# Altium PCB PCB1.PcbDoc
Units mm, origin at the board's own origin, x right, y up, seen from the top; angles counter-clockwise.
Board outline 152.4 x 101.6 mm, 2 copper layers (Top Layer, Bottom Layer); 11 components, 7 nets, 27 pads, 0 vias.
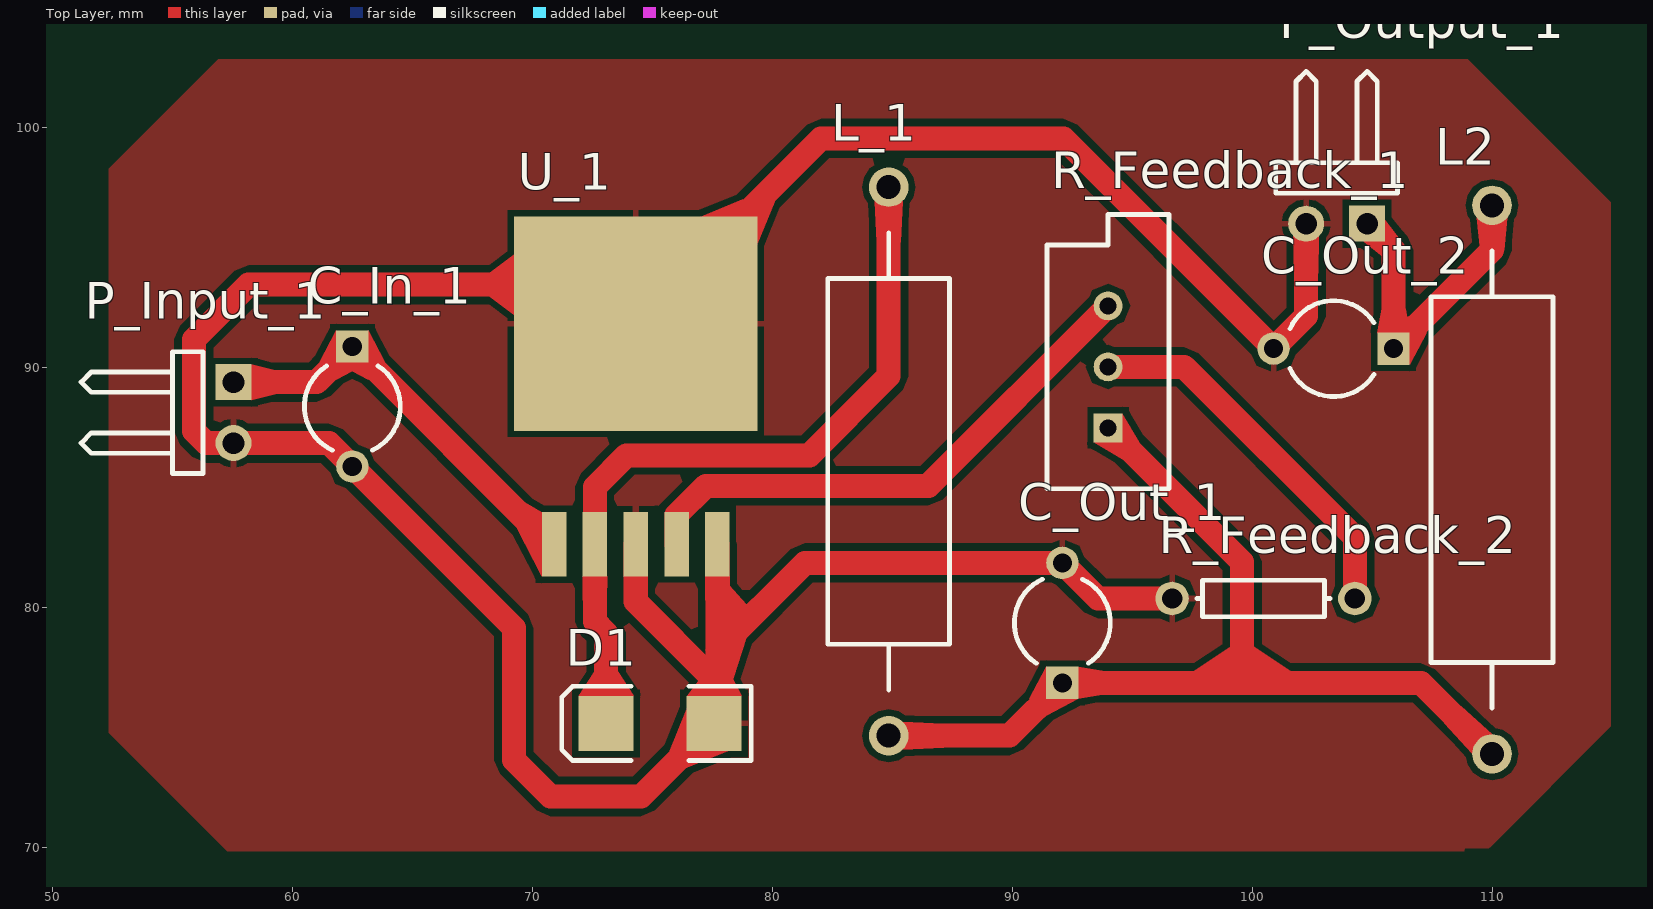
[diagram p0: Top Layer view]
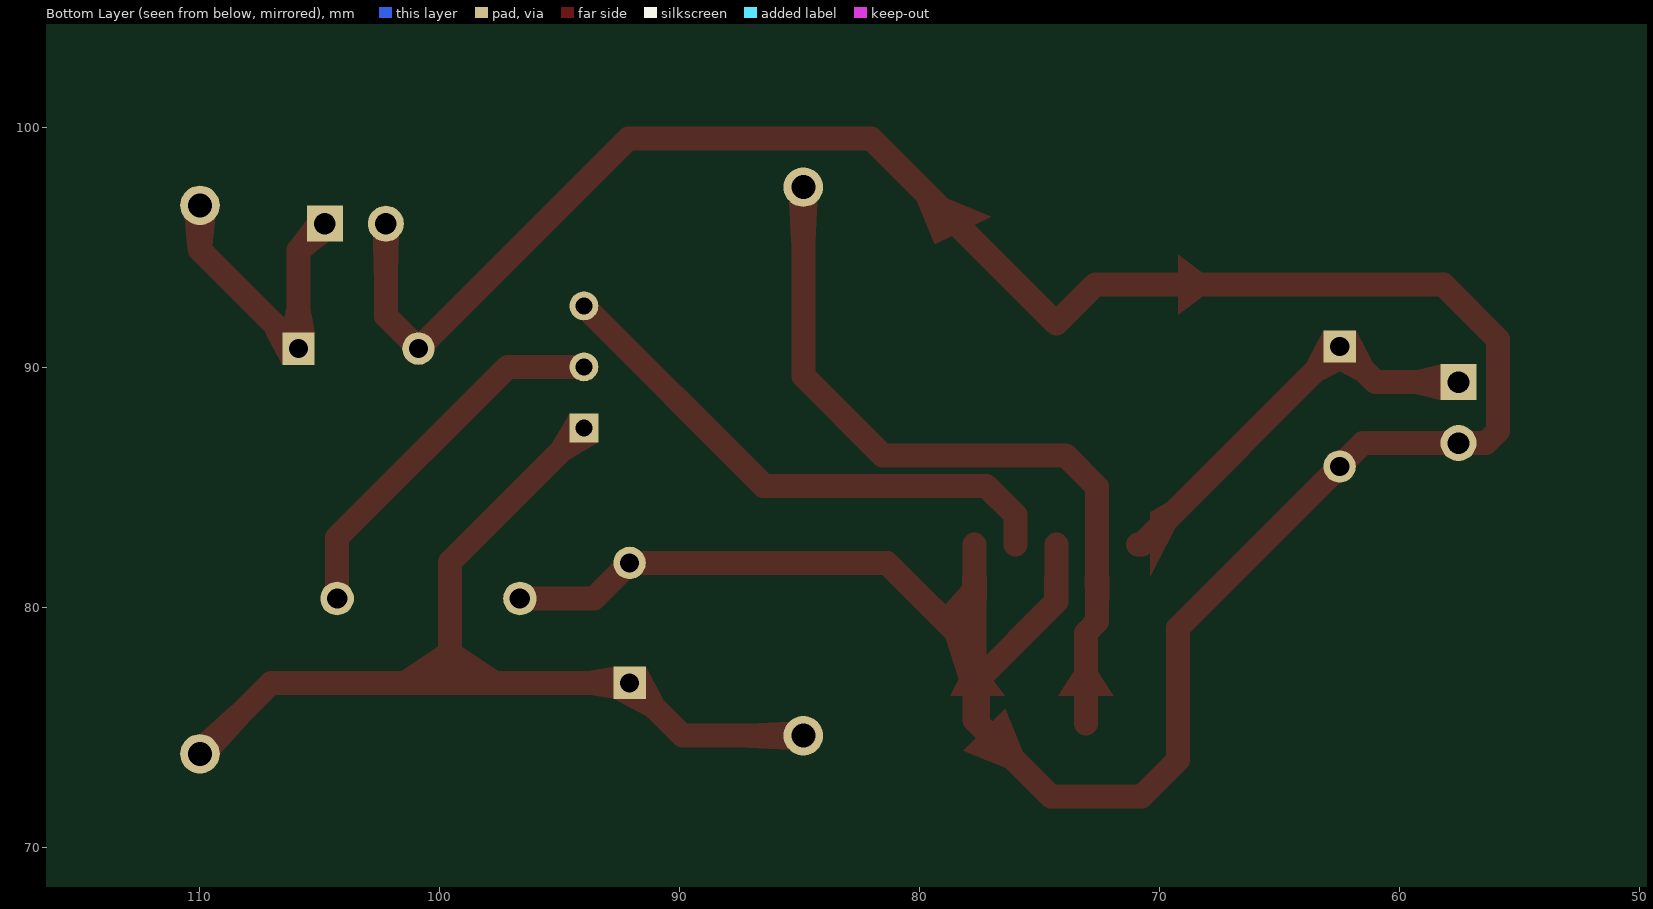
[diagram p1: Bottom Layer view, seen from below]

## Layer stack, top to bottom
Top Solder: solder mask 0.0102, Solder Resist, Dk 3.5
Top Layer: signal copper 0.0356
Dielectric 1: dielectric 0.32, FR-4, Dk 4.8
Bottom Layer: signal copper 0.0356
Bottom Solder: solder mask 0.0102, Solder Resist, Dk 3.5

## Board outline
25.4,25.4 177.8,25.4 177.8,127 25.4,127

## Design rules (kind name [scope] priority, off if disabled: settings)
Clearance [All] p1: gap=0.254 ignorepadtopadclearanceinfootprint=FALSE except(0: Arc-Hole Track-Hole SMDPad-Hole THPad-Hole Via-Hole Fill-Hole Poly-Hole Region-Hole Text-Hole)
PolygonConnect [All] p1: connectstyle=Relief reliefconductorwidth=0.254 reliefentries=4 polygonreliefangle="90 Angle" airgapwidth=0.254
RoutingVias [All] p1: holewidth=0.711 width=1.27 viastyle="Through Hole" minholewidth=0.711 minwidth=1.27 maxholewidth=0.711 maxwidth=1.27
SolderMaskExpansion [All] p1: expansion=0.102
Width [All] p1: maxlimit=1 minlimit=0.254 preferedwidth=0.5
30 further rules are at their usual default settings.

## Components (designator, comment, footprint, x,y, rotation, side; value= is the part's Value field where it differs from the comment)
C_In_1 "Cap2" CAPR5-4X5 62.484,88.392 r270 top value=100uF
C_Out_1 "Cap2" CAPR5-4X5 92.075,79.375 r90 top value=220uF
C_Out_2 "Cap2" CAPR5-4X5 103.378,90.805 r180 top value=100uF
D1 "D Schottky" SMB 75.311,75.184 r180 top
L2 "Inductor Iron" AXIAL-0.9 109.982,85.344 r90 top value=10mH
L_1 "Inductor Iron" AXIAL-0.9 84.836,86.106 r270 top value=33uH
P_Input_1 "Header 2H" HDR1X2H 57.531,89.408 r270 top
P_Output_1 "Header 2H" HDR1X2H 104.775,96.012 r180 top
R_Feedback_1 "RPot" VR5 93.98,90.043 r90 top value=50K
R_Feedback_2 "Res1" AXIAL-0.3 100.457,80.391 r0 top value=1.2K
U_1 "LM2596SX-ADJ/NOPB" TO170P1435X465-6N 74.295,91.694 r0 top

## Footprints (in the part's own frame and the unit in brackets; to place one, negate y for a bottom-side part, rotate by r counter-clockwise, add the part's x,y. Pads: shape width x height; smd on the part's side, far side on the other; paste and mask are expansions set on the pad)
AXIAL-0.3 [mm] "Axial Device, Thru-Hole; 2 Leads; 0.3 in Pin Spacing"
  round 1.4 hole 0.85: 1(-3.81,0) 2(3.81,0)
  silkscreen extent -2.77,-0.76 2.77,0.76
AXIAL-0.9 [mm] "Axial Device, Thru-Hole; 2 Leads; 0.9 in Pin Spacing"
  round 1.65 hole 1: 1(-11.43,0) 2(11.43,0)
  silkscreen extent -9.53,-2.54 9.53,2.54
CAPR5-4X5 [mm] "Capacitor; 2 Leads"
  rect 1.35x1.35 hole 0.8: 1(-2.5,0)
  round 1.35 hole 0.8: 2(2.5,0)
  silkscreen extent -1.69,-2 1.82,2
HDR1X2H [mm] "Connector; Header; 2 Position; Right Angle"
  rect 1.5x1.5 hole 0.9: 1(0,0)
  round 1.5 hole 0.9: 2(2.54,0)
  silkscreen extent -1.27,-6.35 3.81,-1.27
SMB [mm] "DO-214-AA/SMB; 2 C-Bend Leads; Body 5.3 x 3.6 mm, inc. leads (LxW)"
  rect 2.3x2.3 smd: 1(-2.25,0) 2(2.25,0)
  silkscreen extent -3.8,-1.55 4.1,1.55
TO170P1435X465-6N [mil]
  rect 40x106 smd: 1(-134,-356) 2(-67,-356) 3(0,-356) 4(67,-356) 5(134,-356)
  rect 400x352 smd: 6(0,6)
VR5 [mm] "Thru-Hole; 3 Leads"
  rect 1.2x1.2 hole 0.7: 1(-2.54,0)
  round 1.2 hole 0.7: 2(0,0) 3(2.54,0)
  silkscreen extent -5.08,-2.54 6.35,2.54

## Part data
C_In_1 C_Out_1 C_Out_2: "Capacitor", PackageDescription="Capacitor; 2 Leads", PackageReference=CAPR5-4X5, Published=23-Sep-2002, Publisher="Altium Limited"
D1: "Schottky Diode", Code_JEDEC=DO-214-AA, LatestRevisionDate=17-Jul-2002, LatestRevisionNote="Re-released for DXP Platform.", PackageDescription="DO-214-AA/SMB; 2 C-Bend Leads; Body 5.3 x 3.6 mm, inc. leads (LxW)", PackageReference=SMB, Published=8-Jun-2000, Publisher="Altium Limited"
L2 L_1: "Magnetic-Core Inductor", LatestRevisionDate=17-Jul-2002, LatestRevisionNote="Re-released for DXP Platform.", PackageDescription="Axial Device, Thru-Hole; 2 Leads; 0.9 in Pin Spacing", PackageReference=AXIAL-0.9, Published=24-Mar-1999, Publisher="Altium Limited"
P_Input_1 P_Output_1: "Header, 2-Pin, Right Angle", LatestRevisionDate=17-Jul-2002, LatestRevisionNote="Re-released for DXP Platform.", Publisher="Altium Limited"
R_Feedback_1: "Potentiometer", LatestRevisionDate=17-Jul-2002, LatestRevisionNote="Re-released for DXP Platform.", PackageDescription="Variable Resistor, Thru-Hole; 3 Leads", PackageReference=VR5, Published=8-Jun-2000, Publisher="Altium Limited", Set Position=0.5, Sim Note="Enter the Resistance value and the set point into parameter fields."
R_Feedback_2: "Resistor", LatestRevisionDate=17-Jul-2002, LatestRevisionNote="Re-released for DXP Platform.", PackageDescription="Axial Device, Thru-Hole; 2 Leads; 0.3 in Pin Spacing", PackageReference=AXIAL-0.3, Published=8-Jun-2000, Publisher="Altium Limited"
U_1: "SIMPLE SWITCHER® 4.5V to 40V, 3A Low Component Count Step-Down Regulator 5-DDPAK/TO-263 -40 to 125", Package="TO-263-6 Texas Instruments", Availability=Unavailable, MF="Texas Instruments", MP=LM2596SX-ADJ/NOPB, Price=None, SnapEDA_Link=https://www.snapeda.com/parts/LM2596SX-ADJ/NOPB/Texas%20Instruments/view-part/?ref=snap

## Nets (pads, with @x,y where several pads share a name; then routed paths per layer and width w, separated by ;. In a path a pad name is that pad's centre, name@x,y a point inside that pad or via, vN(x,y) a via of type N, cw(c..) or ccw(c..) an arc to the next point about the centre after c; other vN are vias at no path point)
GND: C_In_1.2 C_Out_1.2 C_Out_2.2 D1.1 P_Input_1.2 P_Output_1.2 R_Feedback_2.1 U_1.3 U_1.5 U_1.6 | length 132.9
  Top Layer w1: U_1.3 74.295,80.264 77.561,76.998 D1.1 ; U_1.5 77.699,78.232 ; R_Feedback_2.1 93.559,80.391 C_Out_1.2 81.342,81.875 77.699,78.232 ; P_Output_1.2 102.235,92.162 C_Out_2.2 92.115,99.568 82.017,99.568 U_1.6 72.669,93.472 58.166,93.472 55.88,91.186 55.88,87.376 56.388,86.868 P_Input_1.2 61.508,86.868 C_In_1.2 69.215,79.161 69.215,73.66 70.739,72.136 74.513,72.136 D1.1 ; D1.1 77.699,75.322 77.699,78.232
NetC_Out_1_1: C_Out_1.1 L2.1 L_1.2 R_Feedback_1.1 | length 40.2
  Top Layer w1: L_1.2 89.876,74.676 C_Out_1.1 99.568,76.875 ; R_Feedback_1.1 99.568,81.915 99.568,76.875 ; L2.1 107.021,76.875 99.568,76.875
NetD1_2: D1.2 L_1.1 U_1.2 | length 32.1
  Top Layer w1: D1.2 73.061,78.958 72.593,79.426 U_1.2 72.593,85.039 73.914,86.36 81.534,86.36 84.836,89.662 L_1.1
NetR_Feedback_1_2: R_Feedback_1.2 R_Feedback_2.2 | length 15.8
  Top Layer w1: R_Feedback_1.2 97.155,90.043 104.267,82.931 R_Feedback_2.2
NetR_Feedback_1_3: R_Feedback_1.3 U_1.4 | length 22.8
  Top Layer w1: U_1.4 75.997,83.87 77.216,85.09 86.487,85.09 R_Feedback_1.3
VCC_In: C_In_1.1 P_Input_1.1 U_1.1 | length 17.4
  Top Layer w1: P_Input_1.1 61,89.408 C_In_1.1 70.724,82.652 U_1.1
VCC_Out: C_Out_2.1 L2.2 P_Output_1.1 | length 13.3
  Top Layer w1: P_Output_1.1 105.878,94.909 C_Out_2.1 109.982,94.909 L2.2

## Polygon pours and split planes (outlines as drawn)
GND on Top Layer "Top Layer-No Net" (solid, pour order 4): 108.839,69.977 109.855,69.977 114.935,75.057 114.935,96.901 108.966,102.87 56.896,102.87 52.324,98.298 52.324,74.803 57.277,69.85 109.728,69.85